# Altium PCB PCB1.PcbDoc
Units mm, origin at the board's own origin, x right, y up, seen from the top; angles counter-clockwise.
Board outline 25.91 x 59.56 mm, 2 copper layers (Top Layer, Bottom Layer); 1 components, 4 nets, 8 pads, 4 vias.
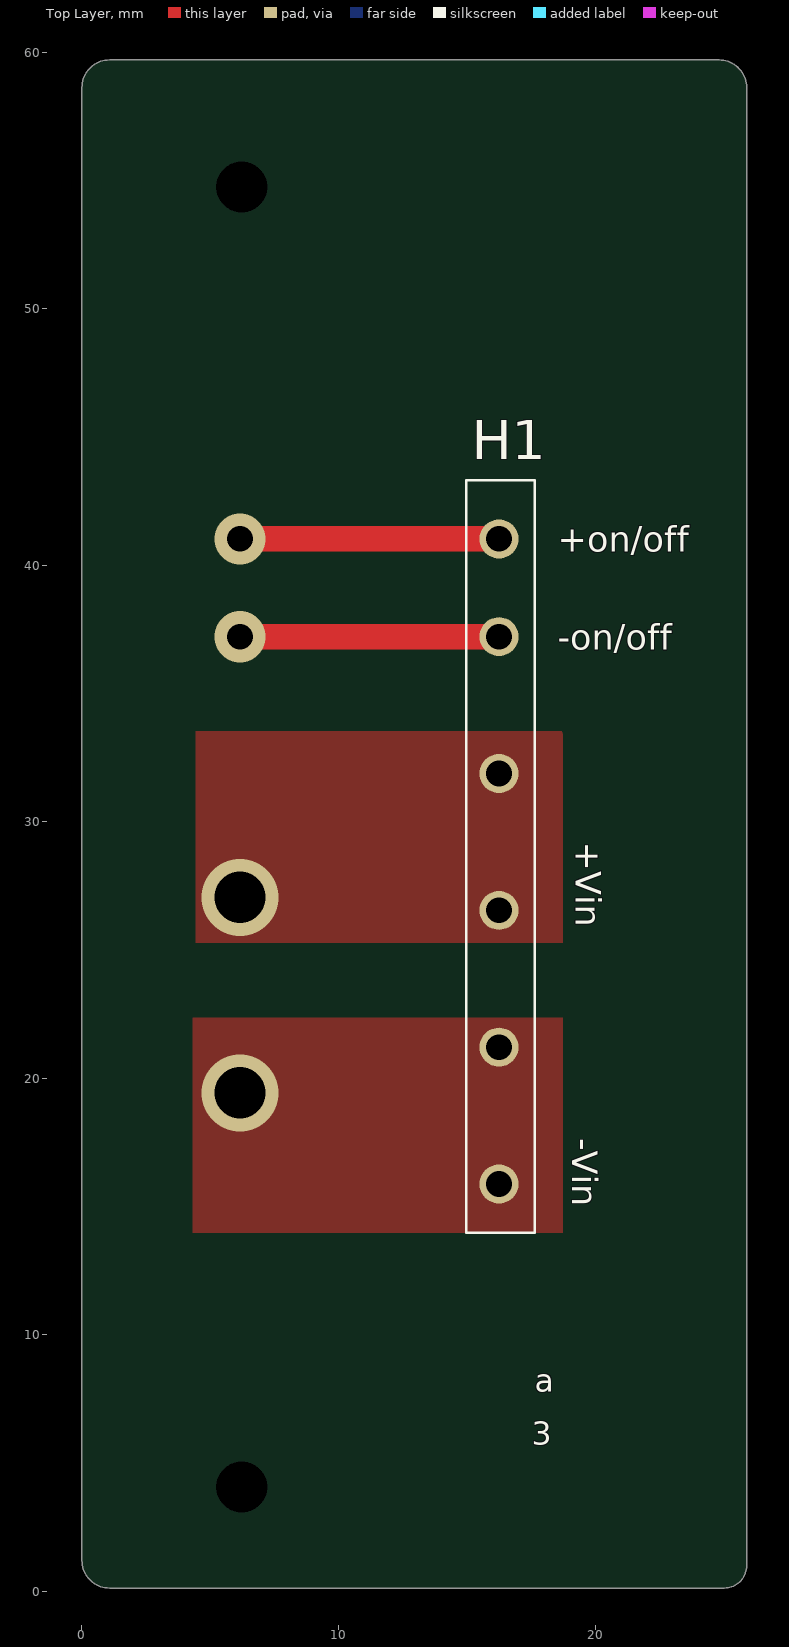
[diagram p0: Top Layer view]
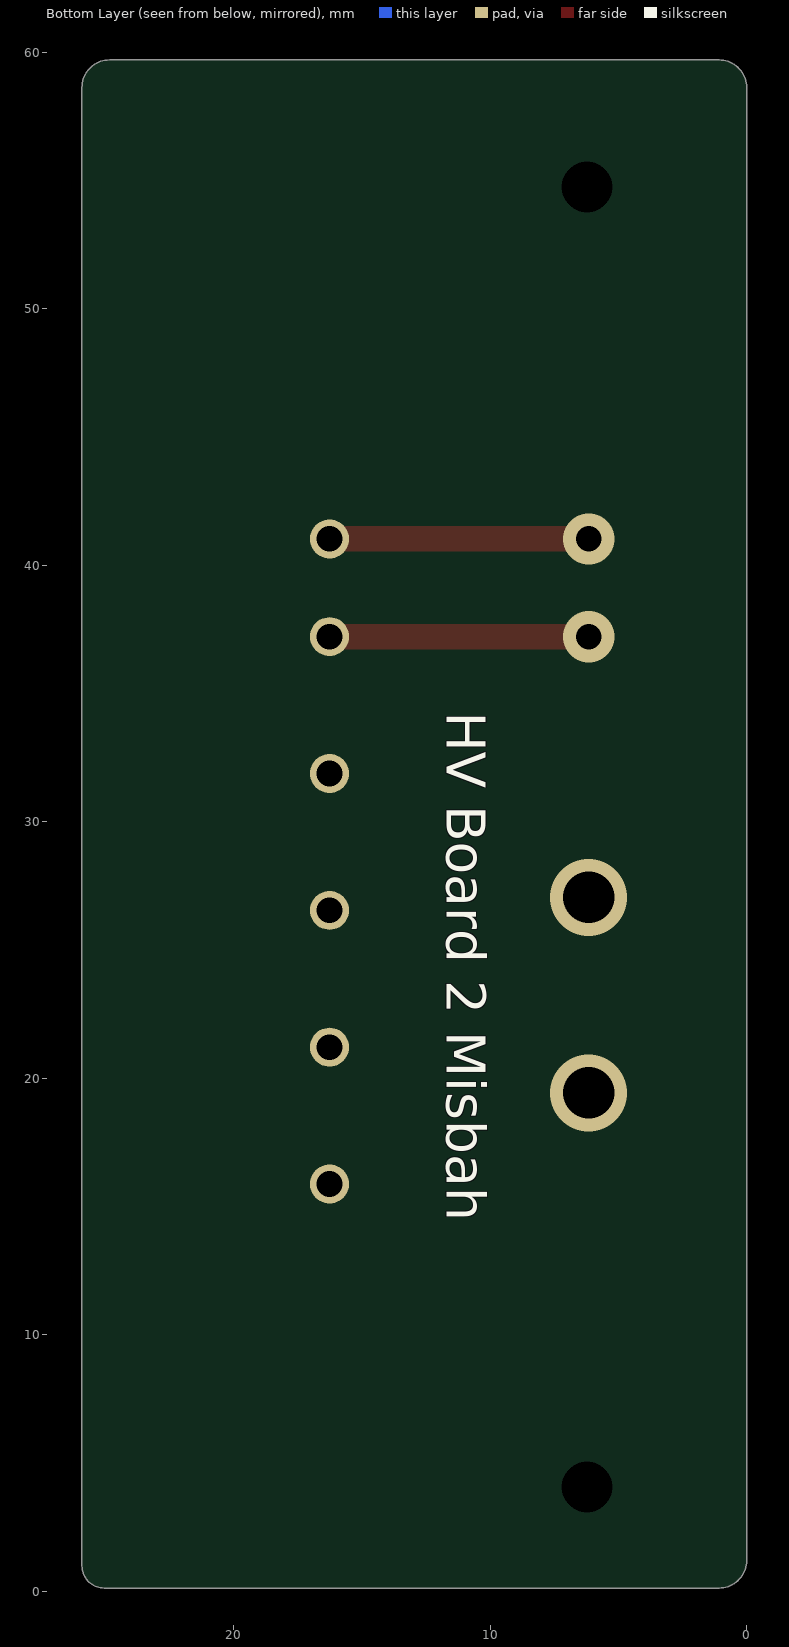
[diagram p1: Bottom Layer view, seen from below]

## Layer stack, top to bottom
Top Solder: solder mask 0.0102, Solder Resist, Dk 3.5
Top Layer: signal copper 0.0356
Dielectric 1: dielectric 0.32, FR-4, Dk 4.8
Bottom Layer: signal copper 0.0356
Bottom Solder: solder mask 0.0102, Solder Resist, Dk 3.5

## Board outline
1.075,0.127 cw(c1.075,1.202) 0,1.202 0,58.615 cw(c1.075,58.615) 1.075,59.69 24.833,59.69 cw(c24.833,58.615) 25.908,58.615 25.908,0.994 cw(c25.041,0.994) 25.041,0.127

## Design rules (kind name [scope] priority, off if disabled: settings)
Clearance [All] p1: gap=0.254 ignorepadtopadclearanceinfootprint=FALSE except(0: Arc-Hole Track-Hole SMDPad-Hole THPad-Hole Via-Hole Fill-Hole Poly-Hole Region-Hole Text-Hole)
NetAntennae [OnLayer('Bottom Layer')] p1: netantennaetolerance=0
PolygonConnect [All] p1: connectstyle=Direct reliefconductorwidth=0.254 reliefentries=4 polygonreliefangle="90 Angle" airgapwidth=0.254
RoutingVias [All] p1: holewidth=0.711 width=1.27 viastyle="Through Hole" minholewidth=0.711 minwidth=1.27 maxholewidth=0.711 maxwidth=1.27
SolderMaskExpansion [All] p1: expansion=0.102 istentingtop=FALSE
Width [All] p1: maxlimit=1 minlimit=0.254 preferedwidth=0.254
29 further rules are at their usual default settings.

## Components (designator, comment, footprint, x,y, rotation, side; value= is the part's Value field where it differs from the comment)
H1 "PPTC061LFBN-RC" "+/- Vinput, on/off" 16.256,15.875 r90 top (schematic designator H?)

## Footprints (in the part's own frame and the unit in brackets; to place one, negate y for a bottom-side part, rotate by r counter-clockwise, add the part's x,y. Pads: shape width x height; smd on the part's side, far side on the other; paste and mask are expansions set on the pad)
"+/- Vinput, on/off" [mil]
  round 60 hole 39.37: 1(0,0) 2(210,0) 3(420,0) 4(630,0) 5(840,0) 6(990,0)
  silkscreen extent -75,-55 1080,50

## Part data
H1: "Female, 6 C, Straight, .100\"CC; 3.20mm Tail, No Mt. 100u\" Tin; PBT, Phos Bronze, 105 C", Flammability Rating="UL94 V-0", Insulation Color=Black, Manufacturer=Sullins, Max Operating Temperature=105°C, Min Operating Temperature=-40°C, Supplier Part Number=S7004-ND, Voltage Rating=250V, Category=Connectors, ComponentLink1Description=https://media.digikey.com/pdf/Data%20Sheets/Sullins%20PDFs/Female_Headers.100_DS.pdf?src-supplier=Digi-Key, ComponentLink1URL=https://media.digikey.com/pdf/Data%20Sheets/Sullins%20PDFs/Female_Headers.100_DS.pdf?src-supplier=Digi-Key, ComponentLink2Description=http://www.sullinscorp.com/catalogs/78_Page80-81_HEADER_.100_2.54mm_FEMALE.pdf?src-supplier=Future+Electronics, ComponentLink2URL=http://www.sullinscorp.com/catalogs/78_Page80-81_HEADER_.100_2.54mm_FEMALE.pdf?src-supplier=Future+Electronics, Connector Type=Header, Contact Finish - Mating=TIN, Contact Material=Bronze, Contact Shape=Square, Contact Type="Female Socket", Fastening Type=Pull, Height=8.5mm, Housing Material=Plastic, Insulation Material=Polyester, Lead Free="Lead Free", Length=15.7mm, Manufacturer Part Number=PPTC061LFBN-RC, Mounting Technology="Through Hole", Number of Positions=6, Number of Rows=1, Packaging=Tray, Pitch=2.54mm, Pricing="1=0.52, 10=0.449, 80=0.3705, 440=0.3222, 1000=0.26582, 5000=0.2336, 10000=0.2327 (USD)", RoHS=Yes, RoHS Compliant=Yes, Series=-, Stock=36910, Supplier=Digi-Key, Termination=Solder, Width=2.5mm

## Free pads (board coordinates)
  round 0 hole 2 unplated: ""(6.223,4.064)
  round 0 hole 2: ""(6.223,54.737)

## Via types
v1: diameter 3, hole 2, Top Layer to Bottom Layer, 2 vias
v2: diameter 2, hole 1, Top Layer to Bottom Layer, 2 vias

## Nets (pads, with @x,y where several pads share a name; then routed paths per layer and width w, separated by ;. In a path a pad name is that pad's centre, name@x,y a point inside that pad or via, vN(x,y) a via of type N, cw(c..) or ccw(c..) an arc to the next point about the centre after c; other vN are vias at no path point)
+on/off: H1.6 | length 10
  Top Layer w1: v2(6.159,41.021) H1.6@16.192,41.021
+Vin: H1.3 H1.4
  other v1: 6.159,27.051
-on/off: H1.5 | length 10
  Top Layer w1: v2(6.159,37.211) H1.5@16.192,37.211
-Vin: H1.1 H1.2
  other v1: 6.159,19.431

## Polygon pours and split planes (outlines as drawn)
-Vin on Top Layer "-VIN_L01_P001" (solid, pour order 1): 4.318,22.352 4.318,13.97 14.034,13.97 14.034,22.352 18.732,22.352 18.732,13.97 14.034,13.97 14.034,22.352
+Vin on Top Layer "+VIN_L01_P002" (solid, pour order 2): 4.445,33.528 18.86,33.528 18.732,33.401 18.732,25.273 4.445,25.273

## Silkscreen, mask and mechanical layers (free items; w line width, h text height)
Top Overlay:
  text "+on/off" at 18.542,40.513 h1
  text "-on/off" at 18.542,36.703 h1
  text "+Vin" at 19.241,29.21 h1 r270
  text "-Vin" at 19.113,17.653 h1 r270
  text "a" at 17.653,7.493 h1.52
  text "3" at 17.523,5.428 h1.52
Bottom Overlay:
  text "HV Board 2 Misbah" at 11.684,34.29 h1.52 r90
Mechanical 1:
  the board outline again, w0.1